# Altium PCB LP_ECG-X01.PcbDoc (part 4 of 4)
Units mm, origin at the board's own origin, x right, y up, seen from the top; angles counter-clockwise.
Board outline 54.86 x 17.53 mm, 2 copper layers (Top Layer, Bottom Layer), stack 0.141 mm thick; 98 components, 68 nets, 322 pads, 93 vias.
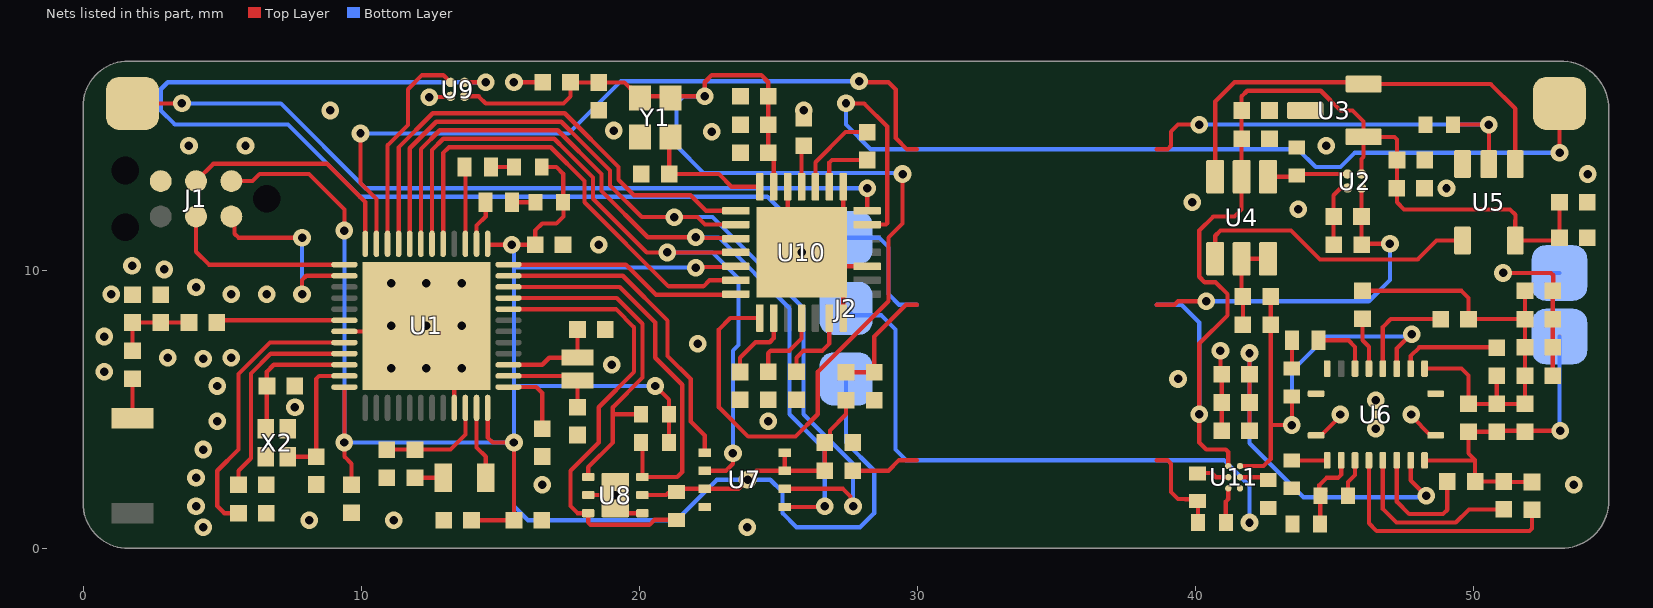
[diagram p2: the nets of this part, all layers, seen from the top]

## Other copper (continued)
Bottom Layer: (continued)
  region net GND: 29.972,0.508 29.972,5.842 38.608,5.842 38.608,0.508
  region net NetJ4_1: 29.972,11.684 29.972,17.018 38.608,17.018 38.608,11.684
  region net V_BATT: 29.972,6.096 29.972,11.43 38.608,11.43 38.608,6.096

## Silkscreen, mask and mechanical layers (free items; w line width, h text height)
Top Overlay:
  lines w0.254: 0,1.633 ccw(c1.629,1.633) 1.629,0.004 52.578,0.004 53.137,0.004 ccw(c53.137,1.731) 54.864,1.731 54.864,15.792 ccw(c53.13,15.792) 53.13,17.526 52.324,17.526 2.794,17.526 1.638,17.526 ccw(c1.638,15.888) 0,15.888 0,1.633
Bottom Overlay:
  lines w0.254: 0,1.638 ccw(c1.638,1.638) 1.638,0 1.892,0 53.13,0 ccw(c53.13,1.734) 54.864,1.734 54.864,15.792 ccw(c53.13,15.792) 53.13,17.526 51.816,17.526 1.638,17.526 ccw(c1.638,15.888) 0,15.888 0,1.892 0,1.638
Board_Outline:
  the board outline again, w0.254